# EAGLE board BATT_DCDC_TEST_BED (EAGLE 9.6.2)
REV: C
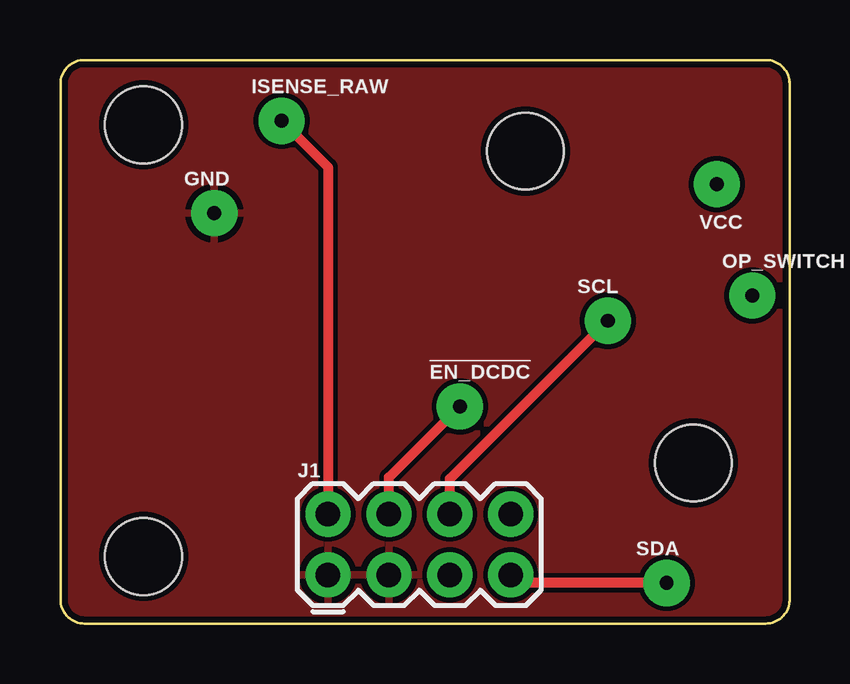
[diagram p0: board, top side]
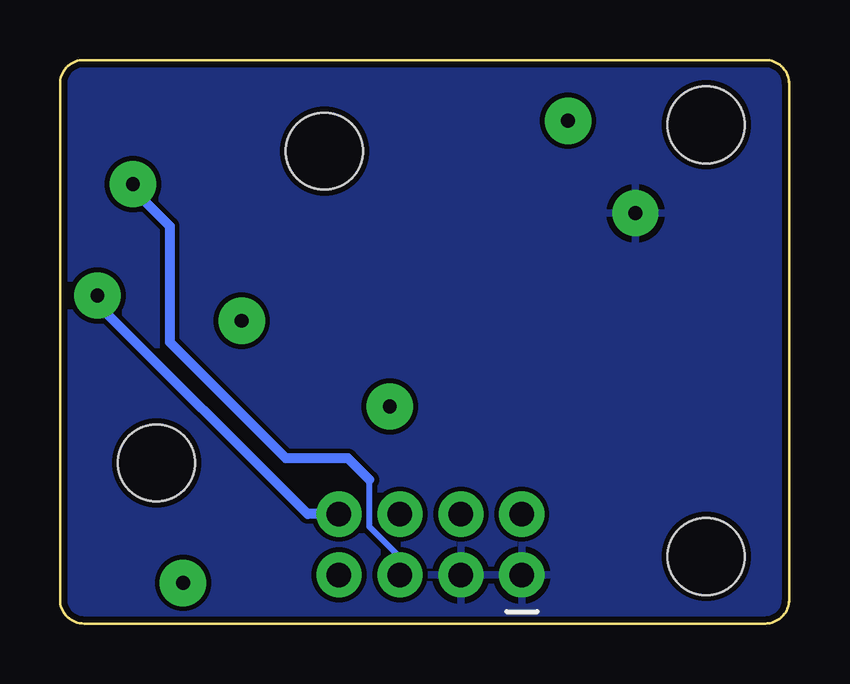
[diagram p1: board, bottom side, seen from below]

Size 30.42 x 23.5 mm. Coordinates in mm from the lower left corner, seen from the top.
Outline: 29.42,0 1.02,0 arc-90 0.02,1 0.02,22.5 arc-90 1.02,23.5 29.42,23.5 arc-90 30.42,22.5 30.42,1 arc-90 29.42,0
Outline: 29.4,23.5 1,23.5 arc90 0,22.5 0,1 arc90 1,0 29.4,0 arc90 30.4,1 30.4,22.5 arc90 29.4,23.5
Copper layers (1+2*15+16): Top 0.035mm / dielectric 1.5mm / Route2 0.035mm / dielectric 0.15mm / Route15 0.035mm / dielectric 0.2mm / Bottom 0.035mm
Design rules "adafruit *": minimum track width 0.15mm, minimum drill 0.25mm, track to track 8mil, track to pad 8mil, pad to pad 8mil, via to via 8mil, smd to smd 8mil, copper to edge 10mil, drill to drill 8mil, minimum pad ring 10mil, minimum via ring 8mil, stop-mask expansion 2mil, vias tented up to drill 20mil, thermal gap 10mil
Net classes: 2 gnd: width 0.305 mm, drill 0.483 mm, clearance 0.203 mm
Holes 3.2 mm at 3.48,2.8 3.48,20.8 19.4,19.7 26.4,6.7

## Footprints (pad centres in the part's own frame; a part is rotated, then mirrored left to right if it is on the bottom)
1X01_POGOPIN_HOLE_0.061_DIA = drill 0.58 pad 1.93: 2 0,0
2X4 = drill 1.016 pad 1.88: 1 -3.81,-1.27; 2 -3.81,1.27; 3 -1.27,-1.27; 4 -1.27,1.27; 5 1.27,-1.27; 6 1.27,1.27; 7 3.81,-1.27; 8 3.81,1.27

## Placement (x,y rotation side)
!EN_DCDC!  [1X01_POGOPIN_HOLE_0.061_DIA]  16.67,9.06 0 top
GND  [1X01_POGOPIN_HOLE_0.061_DIA]  6.43,17.12 0 top
ISENSE_RAW  [1X01_POGOPIN_HOLE_0.061_DIA]  9.24,20.97 0 top
J1  [2X4]  14.98,3.3 0 top
OP_SWITCH  [1X01_POGOPIN_HOLE_0.061_DIA]  28.86,13.68 0 top
SCL  [1X01_POGOPIN_HOLE_0.061_DIA]  22.84,12.63 0 top
SDA  [1X01_POGOPIN_HOLE_0.061_DIA]  25.29,1.7 0 top
VCC  [1X01_POGOPIN_HOLE_0.061_DIA]  27.38,18.33 0 top

## Library data of the parts
!EN_DCDC! GND ISENSE_RAW J1 OP_SWITCH SCL SDA VCC = SparkFun-Connectors

## Nets
EN_DCDC: !EN_DCDC!.2 J1.4
GND: GND.2 J1.1 J1.3
ISENSE_RAW: ISENSE_RAW.2 J1.2
OP_SWITCH: J1.8 OP_SWITCH.2
SCL: J1.6 SCL.2
SDA: J1.7 SDA.2
VCC: J1.5 VCC.2

## Tracks (layer width: path | path; a pad name or v marks a point on that pad's centre or on a via)
EN_DCDC
  Top 0.406: J1.4 13.71,6.1 !EN_DCDC!.2
GND
  pour Top: -0.52,23.8 30.98,23.8 30.98,-0.7 -0.52,-0.7
  pour Bottom: -0.52,23.8 30.98,23.8 30.98,-0.7 -0.52,-0.7
ISENSE_RAW
  Top 0.406: ISENSE_RAW.2 11.17,19.04 J1.2
OP_SWITCH
  Bottom 0.254: OP_SWITCH.2 28.86,13.33
  Bottom 0.406: 28.86,13.33 20.1,4.57 J1.8
SCL
  Top 0.406: J1.6 16.25,6.04 SCL.2
SDA
  Top 0.406: SDA.2 19.12,1.7 J1.7
VCC
  Bottom 0.254: J1.5 16.25,2.77 17.52,4.04 17.52,6 | VCC.2 27.24,18.19 27.24,17.97
  Bottom 0.406: 27.24,17.97 25.84,16.57 25.84,11.74 21,6.9 18.42,6.9 17.52,6